# Altium PCB PCB1.PcbDoc
Units mil, origin at the board's own origin, x right, y up, seen from the top; angles counter-clockwise.
Board outline 2000 x 1900 mil, 2 copper layers (Top Layer, Bottom Layer); 6 components, 5 nets, 14 pads, 0 vias.
Unrouted connection lines stored in the file: 9.
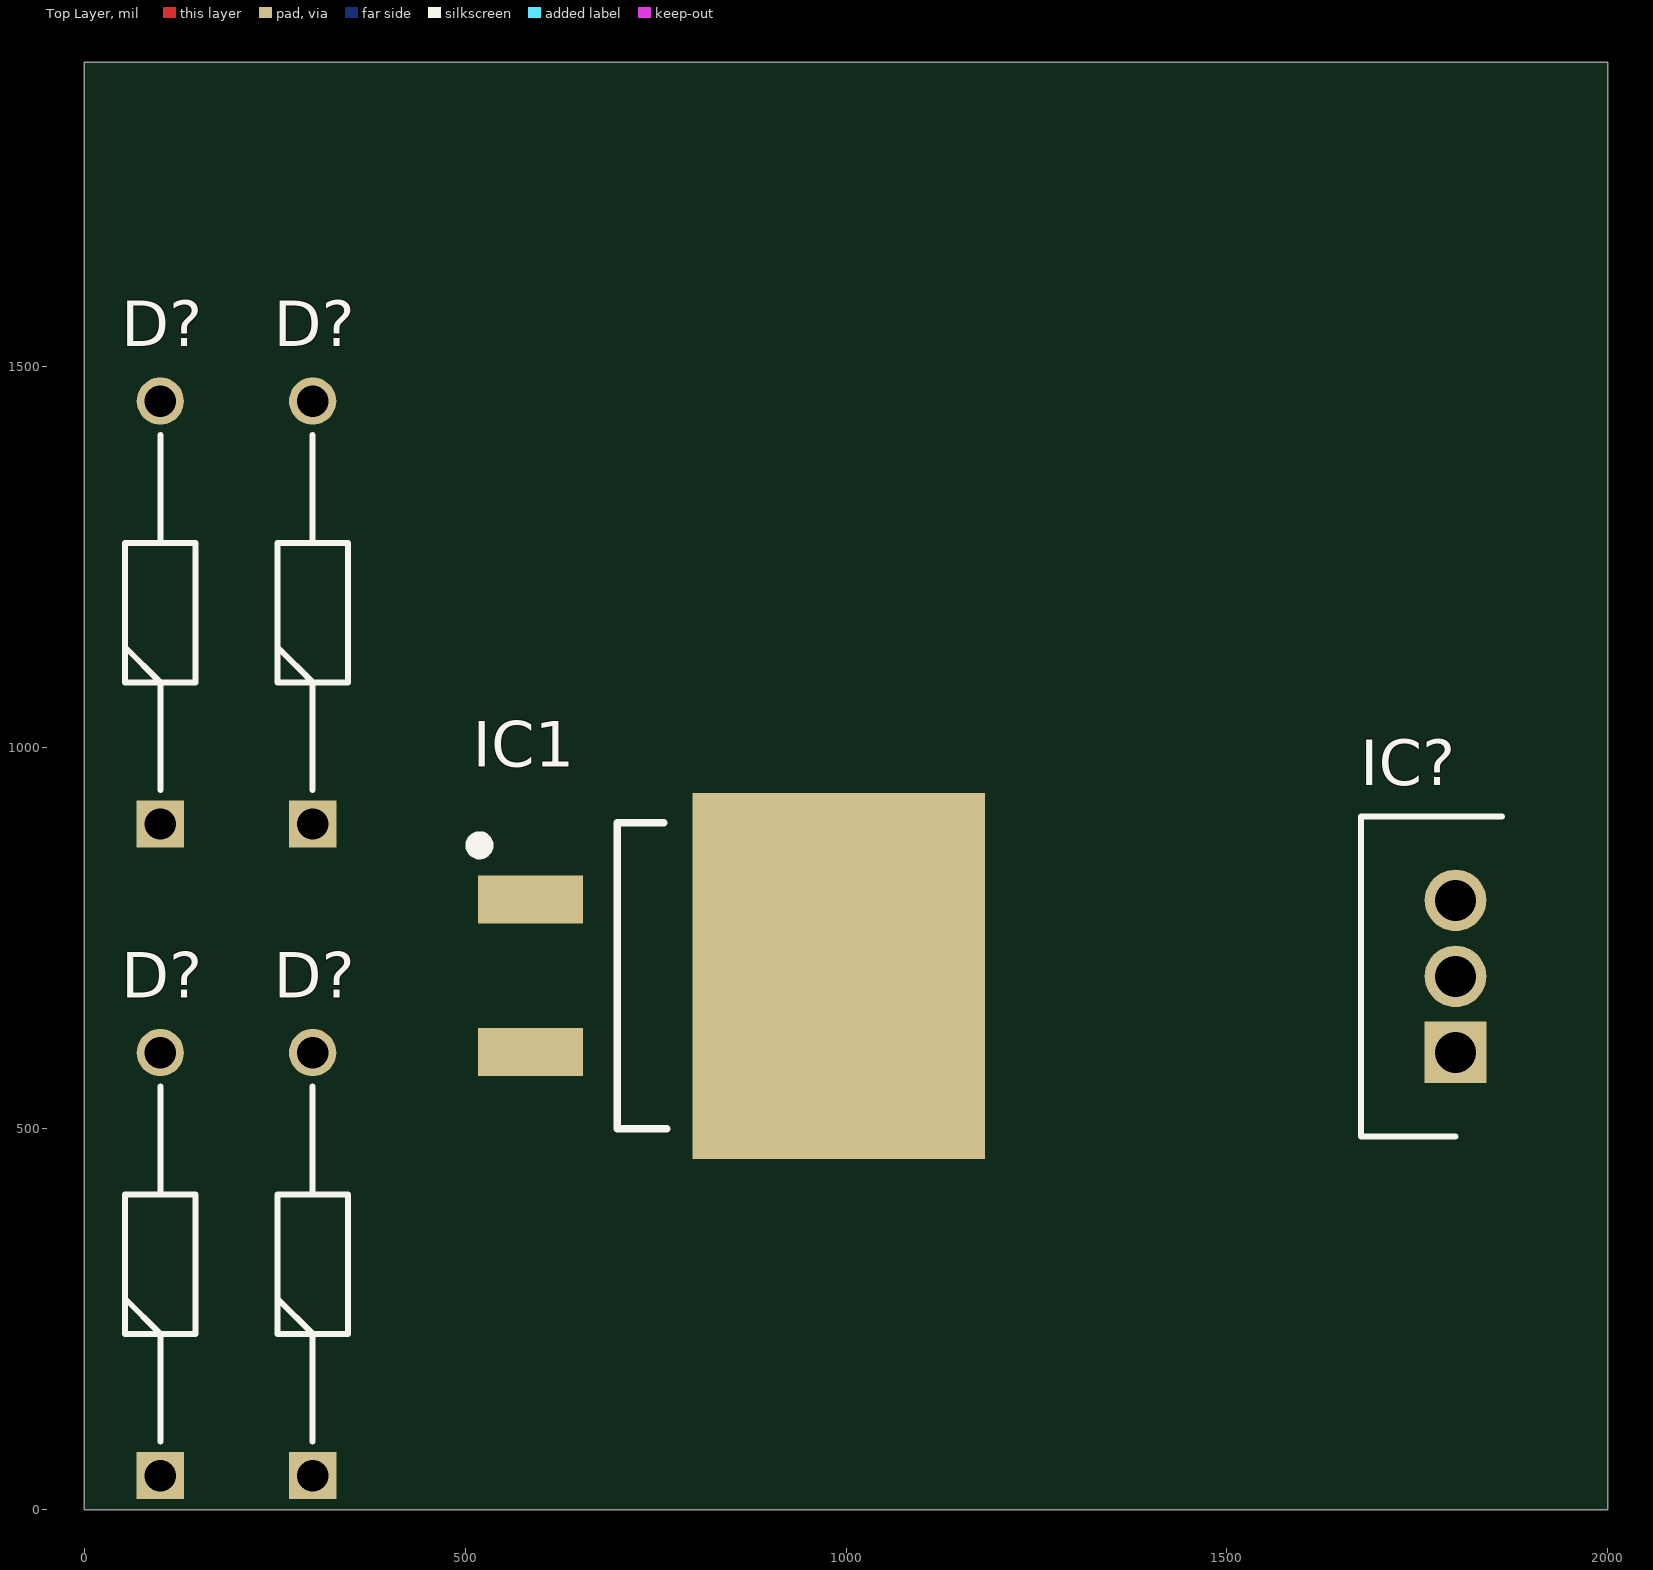
[diagram p0: Top Layer view]
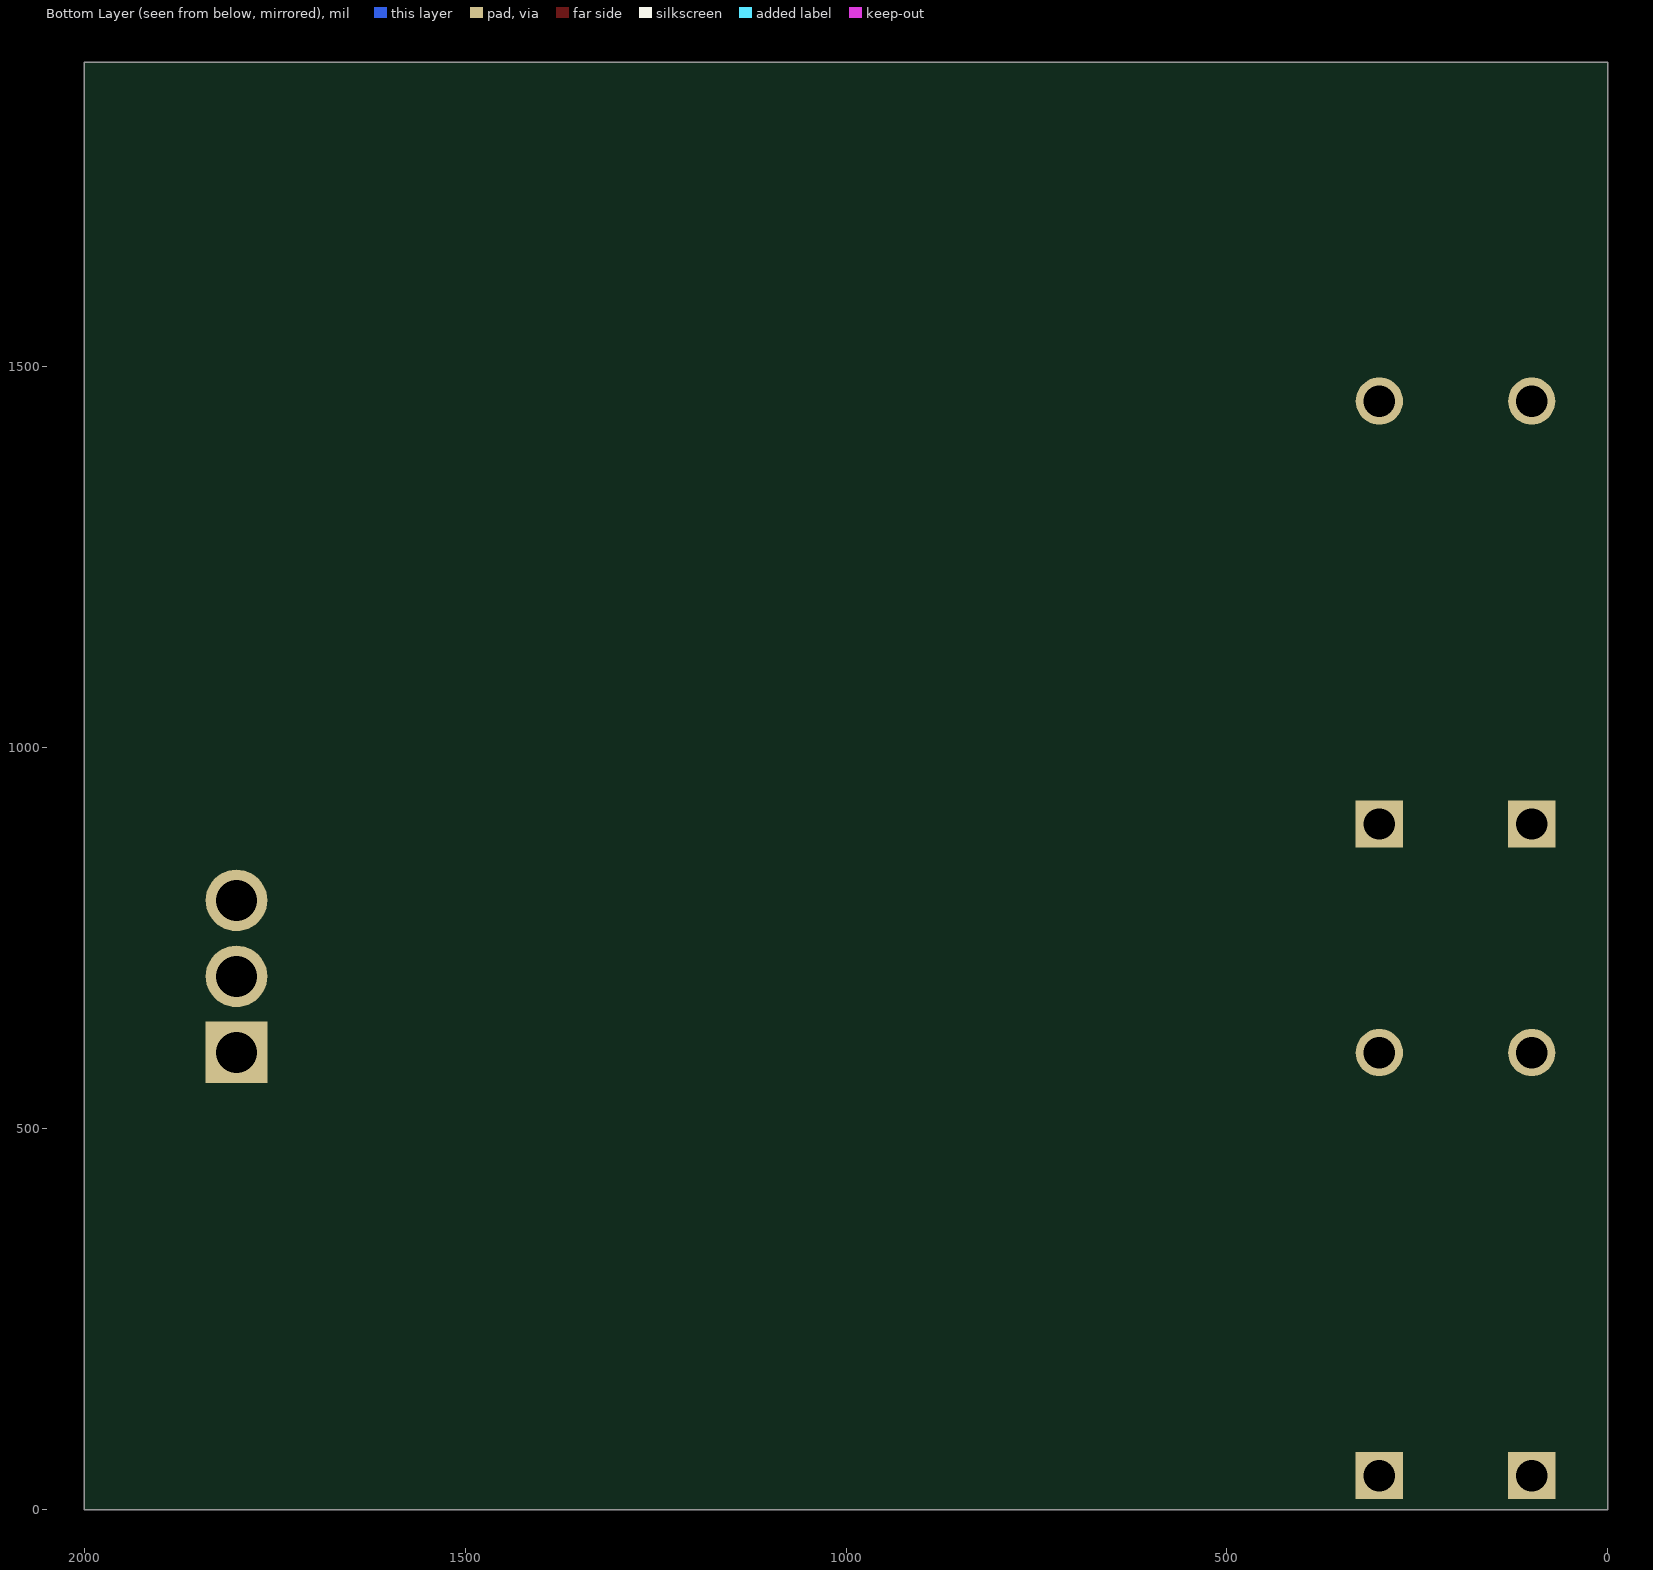
[diagram p1: Bottom Layer view, seen from below]

## Layer stack, top to bottom
Top Solder: solder mask 0.4, Solder Resist, Dk 3.5
Top Layer: signal copper 1.4
Dielectric 1: dielectric 12.6, FR-4, Dk 4.8
Bottom Layer: signal copper 1.4
Bottom Solder: solder mask 0.4, Solder Resist, Dk 3.5

## Board outline
0,0 2000,0 2000,1900 0,1900

## Design rules (kind name [scope] priority, off if disabled: settings)
Clearance [All] p1: gap=10 ignorepadtopadclearanceinfootprint=FALSE except(0: Arc-Hole Track-Hole SMDPad-Hole THPad-Hole Via-Hole Fill-Hole Poly-Hole Region-Hole Text-Hole)
PolygonConnect [All] p1: connectstyle=Relief reliefconductorwidth=10 reliefentries=4 polygonreliefangle="90 Angle" airgapwidth=10
RoutingVias [All] p1: holewidth=28 width=50 viastyle="Through Hole" minholewidth=28 minwidth=50 maxholewidth=28 maxwidth=50
SolderMaskExpansion [All] p1: expansion=4 istentingtop=FALSE
Width [All] p1: maxlimit=10 minlimit=10 preferedwidth=10
30 further rules are at their usual default settings.

## Classes and differential pairs
component class Sheet1: BR? C? D? IC1 J?

## Components (designator, comment, footprint, x,y, rotation, side; value= is the part's Value field where it differs from the comment)
D? "1N4007-E3_73" DIOAD1405W86L465D235 300,44.88 r90 top
D? "1N4007-E3_73" DIOAD1405W86L465D235 300,900 r90 top
D? "1N4007-E3_73" DIOAD1405W86L465D235 100,900 r90 top
D? "1N4007-E3_73" DIOAD1405W86L465D235 100,44.88 r90 top
IC1 "L7805ACD2T-TR" D2PAK-STB35NF10T4 700,500 r180 top (schematic designator IC?)
IC? "LM7812ACT" TO254P470X1016X2019-3P 1800,600.2 r90 top

## Footprints (in the part's own frame and the unit in brackets; to place one, negate y for a bottom-side part, rotate by r counter-clockwise, add the part's x,y. Pads: shape width x height; smd on the part's side, far side on the other; paste and mask are expansions set on the pad)
D2PAK-STB35NF10T4 [mm]
  rect 3.5x1.6 smd: 1(2.904,-7.64) 3(2.904,-2.56)
  rect 9.75x12.2 smd: 4(-7.371,-5.1)
  silkscreen extent -1.64,-10.2 4.82,0, body extent -11.64,-10.28 4.25,0.08, height 4.6
DIOAD1405W86L465D235 [mm]
  rect 1.575x1.575 hole 1.05: 1(0,0)
  round 1.575 hole 1.05: 2(14.1,0)
  silkscreen extent 1.14,-1.17 12.96,1.17, body extent -0.43,-1.34 14.48,1.34, height 2.7
TO254P470X1016X2019-3P [mm]
  rect 2.055x2.055 hole 1.37: 1(0,0)
  round 2.055 hole 1.37: 2(2.535,0) 3(5.07,0)
  silkscreen extent -2.8,-1.55 7.87,3.15, body extent -2.55,-1.55 7.61,3.15, height 18.54

## Part data
D? D? D? D?: "Diode", Arrow Part Number=1N4007-E3/73, Manufacturer_Name=Vishay, Mouser Part Number=625-1N4007-E3/73, Arrow Price/Stock=https://www.arrow.com/en/products/1n4007-e373/vishay?region=europe, Datasheet Link=https://mouser.componentsearchengine.com/Datasheets/2/1N4007-E3_73.pdf, Manufacturer_Part_Number=1N4007-E3/73, Mouser Price/Stock=https://www.mouser.co.uk/ProductDetail/Vishay-General-Semiconductor/1N4007-E3-73?qs=N4vtoAxH%2FSqT3Ng3e4K0Gw%3D%3D
IC1: "Integrated Circuit", Manufacturer_Name=STMicroelectronics, Mouser Part Number=511-L7805ACD2T-TR, Arrow Part Number=L7805ACD2T-TR, Arrow Price/Stock=https://www.arrow.com/en/products/l7805acd2t-tr/stmicroelectronics?region=europe, Datasheet Link=http://www.st.com/web/en/resource/technical/document/datasheet/CD00000444.pdf, Manufacturer_Part_Number=L7805ACD2T-TR, Mouser Price/Stock=https://www.mouser.co.uk/ProductDetail/STMicroelectronics/L7805ACD2T-TR?qs=Ctxo64yJVFuOLXlPPZdJUQ%3D%3D
IC?: "Integrated Circuit", Manufacturer_Name=onsemi, Mouser Part Number=512-LM7812ACT, Arrow Part Number=LM7812ACT, Arrow Price/Stock=https://www.arrow.com/en/products/lm7812act/on-semiconductor, Datasheet Link=https://datasheet.datasheetarchive.com/originals/distributors/Datasheets_SAMA/704b005d7d2d9ced5864f40b6609c1bc.pdf, Height=4.7mm, Manufacturer_Part_Number=LM7812ACT, Mouser Price/Stock=https://www.mouser.com/Search/Refine.aspx?Keyword=512-LM7812ACT

## Nets (pads, with @x,y where several pads share a name; then routed paths per layer and width w, separated by ;. In a path a pad name is that pad's centre, name@x,y a point inside that pad or via, vN(x,y) a via of type N, cw(c..) or ccw(c..) an arc to the next point about the centre after c; other vN are vias at no path point)
NetC1_1: D?.1@100,44.88 D?.1@300,44.88 IC1.1
NetC1_2: D?.1@300,900 D?.2@100,1455.12 D?.2@300,600 D?.2@300,1455.12 IC1.4 IC?.2
NetC2_1: IC1.3 IC?.1
NetC4_1: IC?.3
NetD?_1: D?.1@100,900 D?.2@100,600